# EAGLE board Button (EAGLE 9.6.2)
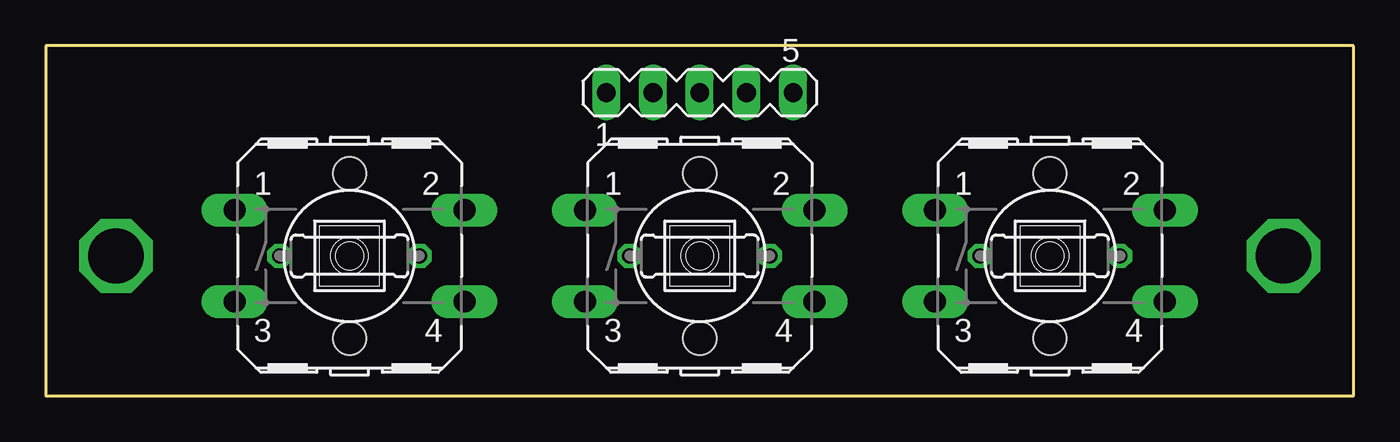
[diagram p0: board, top side]
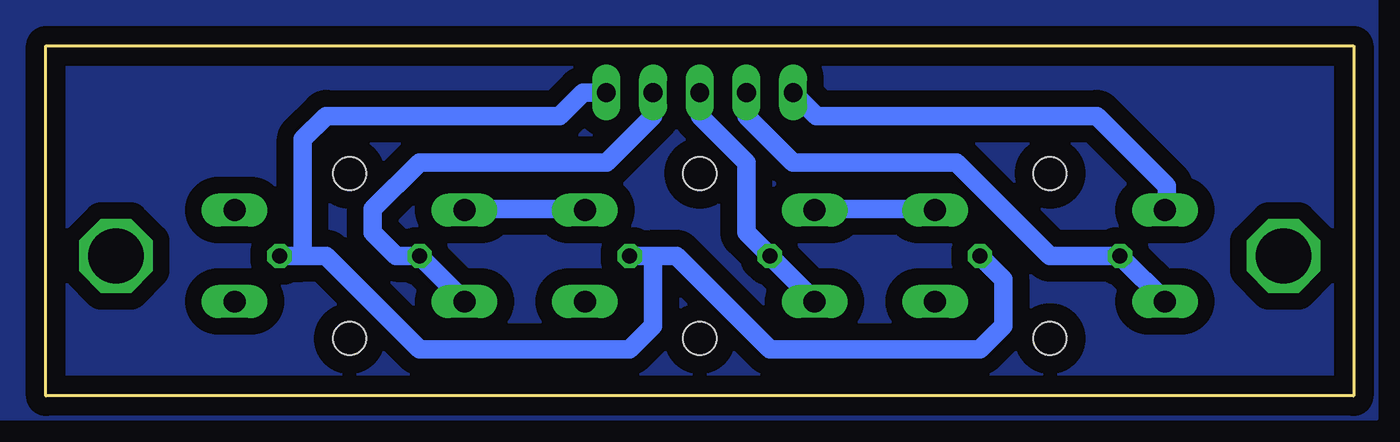
[diagram p1: board, bottom side, seen from below]

Size 71.12 x 19.05 mm. Coordinates in mm from the lower left corner, seen from the top.
Outline: 0,19.05 0,0 71.12,0 71.12,19.05 0,19.05
Copper layers (1*16): Top 0.035mm / dielectric 1.5mm / Bottom 0.035mm
Design rules "default *": minimum track width 6mil, minimum drill 0.35mm, track to track 36mil, track to pad 36mil, pad to pad 6mil, via to via 6mil, smd to smd 6mil, copper to edge 40mil, drill to drill 6mil, minimum pad ring 10mil, minimum via ring 8mil, stop-mask expansion 4mil, vias tented up to drill 0mil, thermal gap 10mil

## Footprints (pad centres in the part's own frame; a part is rotated, then mirrored left to right if it is on the bottom)
B3F-40XX = drill 1.194 long: 1 -6.248,2.489; 2 6.248,2.489; 3 -6.248,-2.489; 4 6.248,-2.489 | hole 1.803: 0,-4.496; 0,4.496
0207/7 = drill 0.813 octagon: 1 -3.81,0; 2 3.81,0
MA05-1 = drill 1.016 long: 1 -5.08,0; 2 -2.54,0; 3 0,0; 4 2.54,0; 5 5.08,0

## Placement (x,y rotation side)
E$1  [B3F-40XX]  16.51,7.62 0 top
E$2  [B3F-40XX]  35.56,7.62 0 top
E$3  [B3F-40XX]  54.61,7.62 0 top
E$4  [0207/7]  16.51,7.62 0 top
E$5  [0207/7]  35.56,7.62 0 top
E$6  [0207/7]  54.61,7.62 0 top
E$7  [MA05-1]  35.56,16.51 0 top

## Library data of the parts
E$1-E$3 = switch-omron
E$4-E$6 = rcl
E$7 = con-lstb

## Nets
S$5: E$7.1
S$6: E$5.1 E$7.3
S$7: E$4.2 E$5.2 E$6.2 E$7.5
S$8: E$4.1 E$7.2
S$10: E$6.1 E$7.4

## Tracks (layer width: path | path; a pad name or v marks a point on that pad's centre or on a via)
RTY
  pour Bottom: -1.27,21.59 -1.27,-1.27 73.66,-1.27 73.66,21.59
S$1  (via drill 3 pad 4)
  other vias: 3.81,7.62
S$2  (via drill 3 pad 4)
  other vias: 67.31,7.62
S$3
  Bottom 1: 22.86,10.16 29.21,10.16
S$4
  Bottom 1: 41.91,10.16 48.26,10.16
S$5
  Bottom 1: E$7.1 29.21,15.24 13.97,15.24 10.16,11.43 10.16,10.16
S$6
  Bottom 1: 29.21,5.08 E$5.1 33.02,8.89 33.02,12.7 35.56,15.24 E$7.3
S$7
  Bottom 1: E$4.2 19.05,6.35 19.05,3.81 20.32,2.54 31.75,2.54 36.83,7.62 38.1,7.62 | E$5.2 38.1,7.62 | 38.1,7.62 38.1,3.81 39.37,2.54 50.8,2.54 55.88,7.62 57.15,7.62 | E$6.2 57.15,7.62 | 57.15,7.62 57.15,13.97 55.88,15.24 43.18,15.24 41.91,16.51 E$7.5
S$8
  Bottom 1: E$7.2 33.02,15.24 30.48,12.7 21.59,12.7 16.51,7.62 E$4.1 10.16,5.08
S$10
  Bottom 1: 48.26,5.08 E$6.1 52.07,7.62 53.34,8.89 53.34,10.16 50.8,12.7 40.64,12.7 38.1,15.24 E$7.4